# Altium PCB Card_reader.PcbDoc
Units mm, origin at the board's own origin, x right, y up, seen from the top; angles counter-clockwise.
Board outline 84.07 x 132.08 mm, 2 copper layers (Top Layer, Bottom Layer); 39 components, 41 nets, 148 pads, 35 vias.
Unrouted connection lines stored in the file: 29.
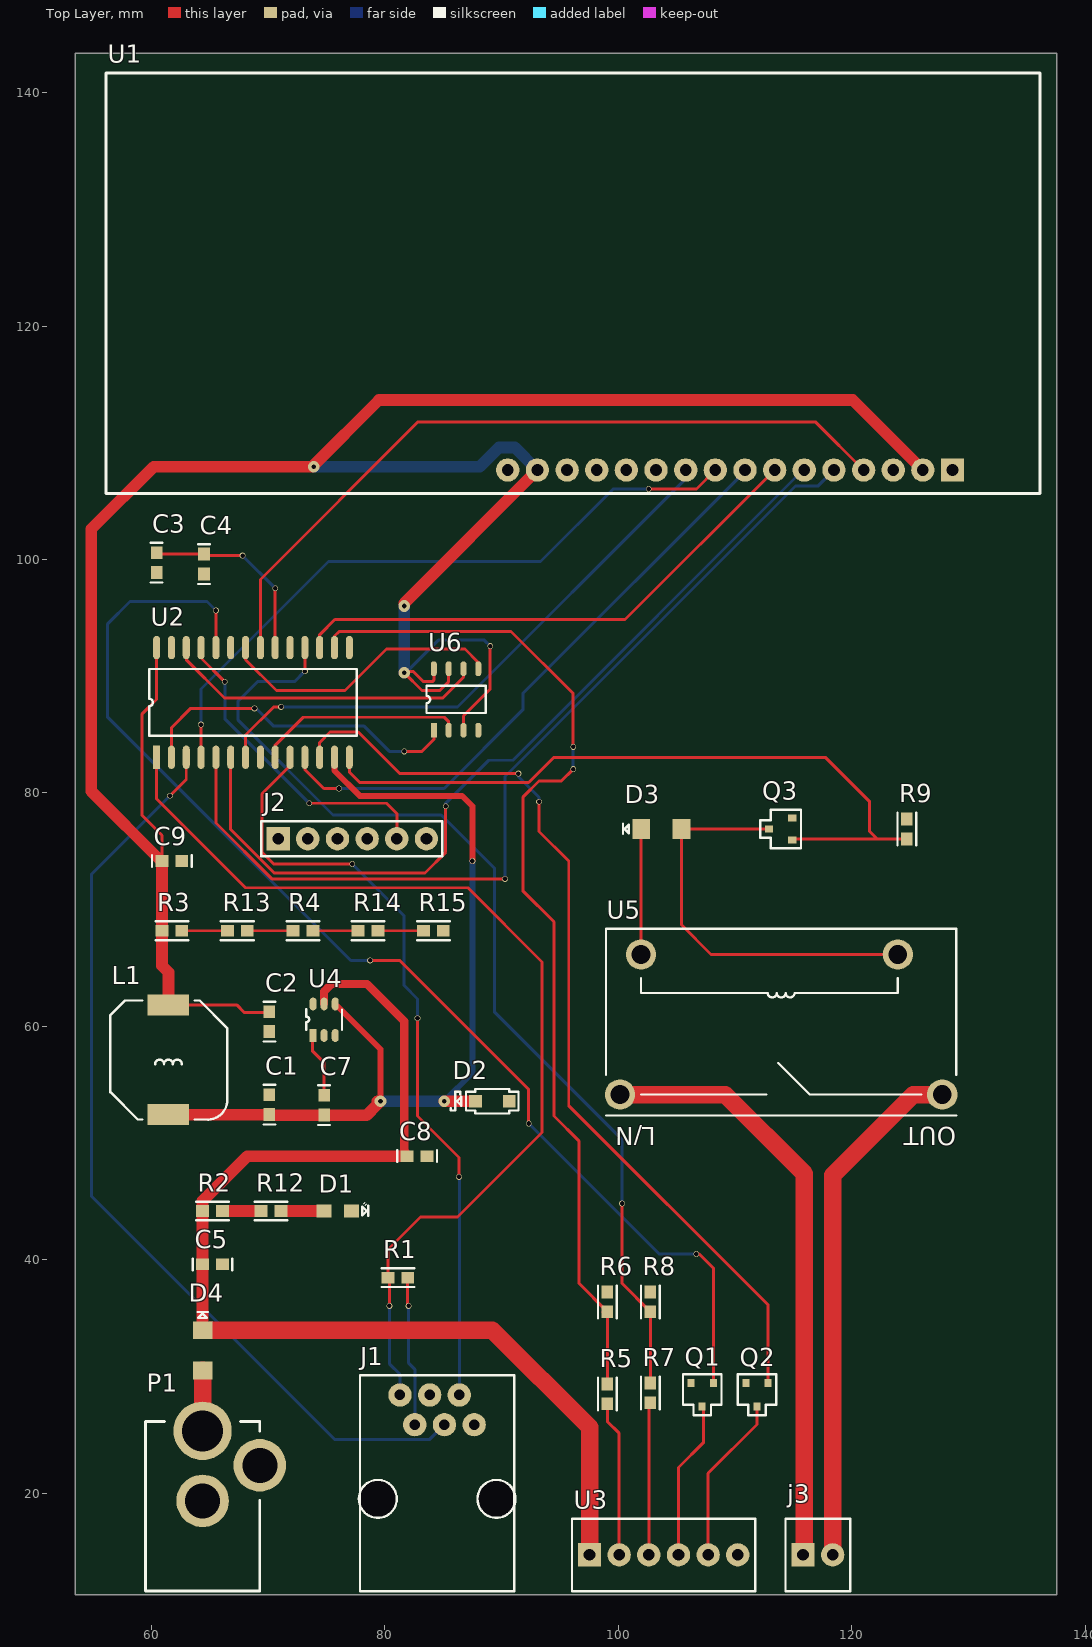
[diagram p0: Top Layer view]
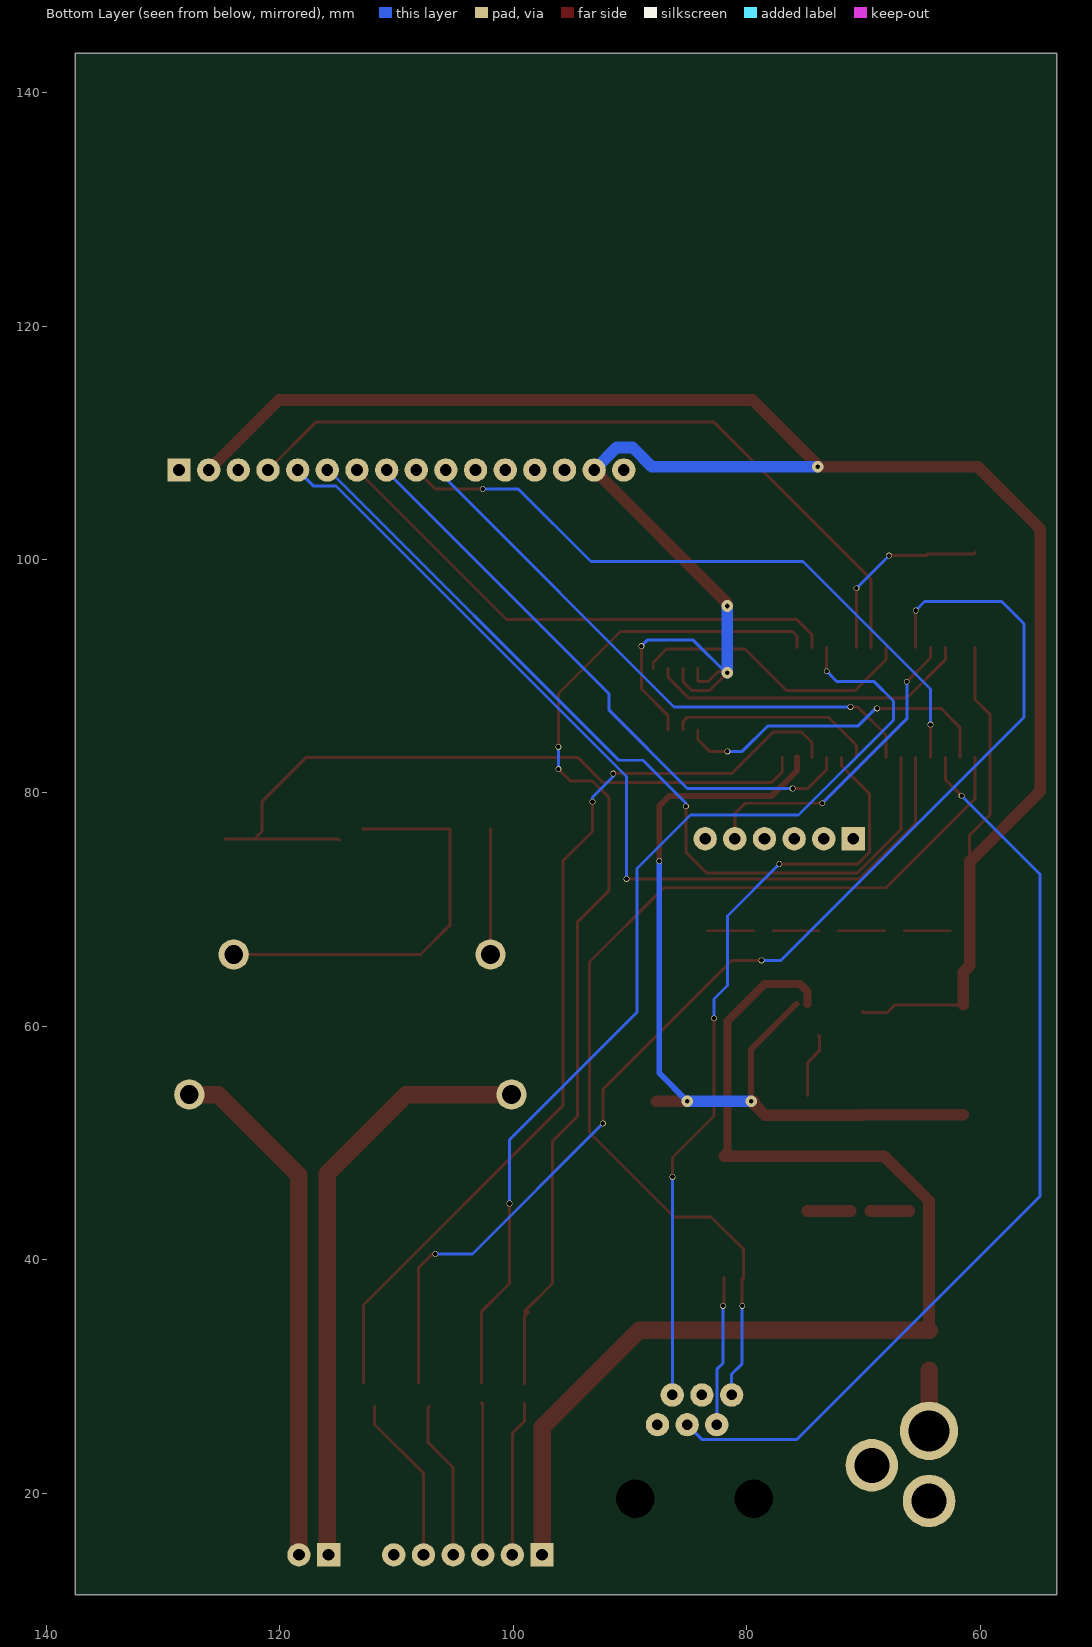
[diagram p1: Bottom Layer view, seen from below]
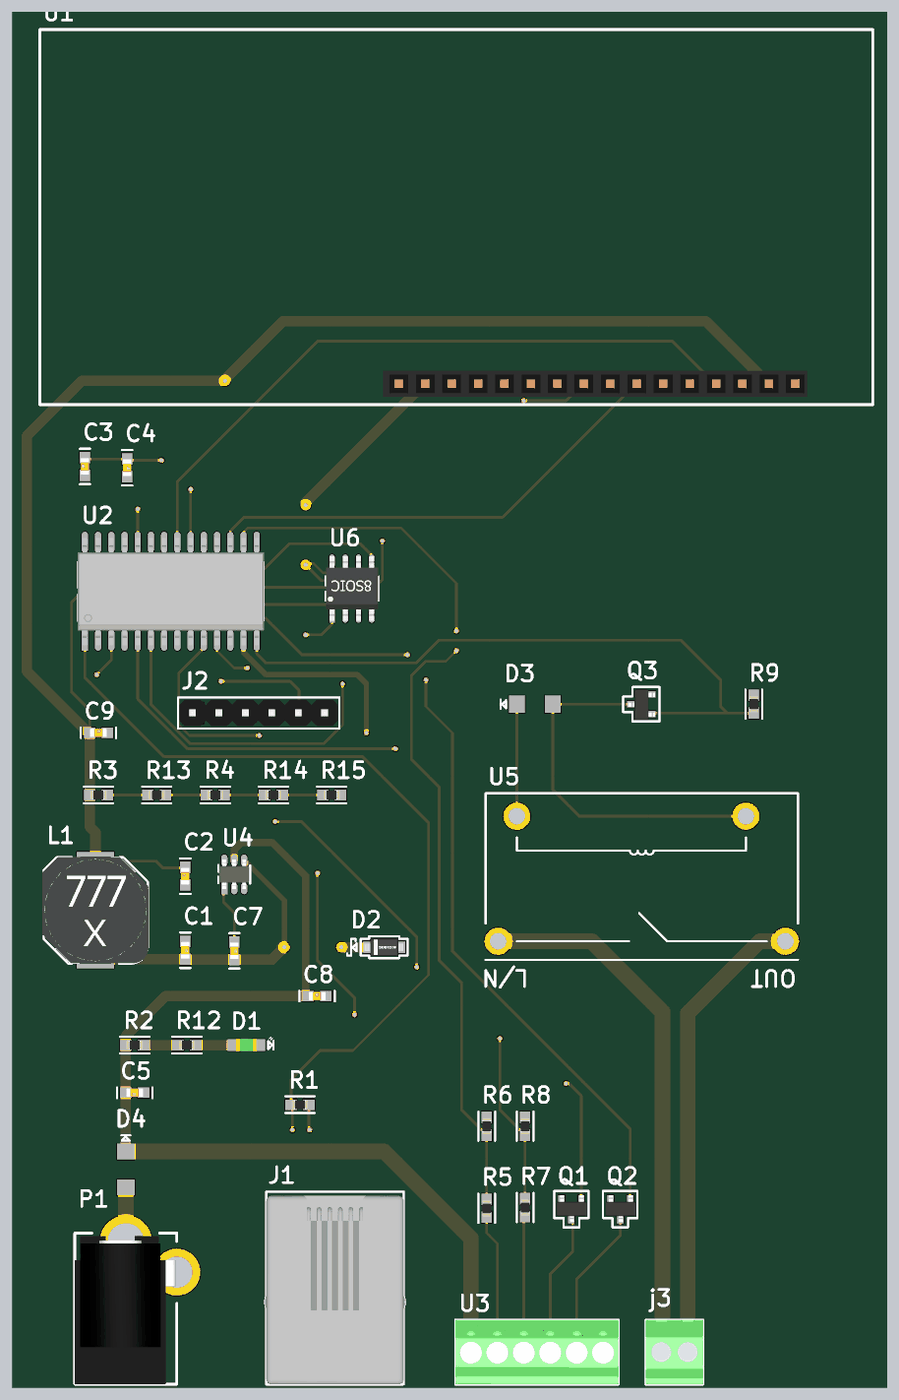
[diagram p2: 3D render of the assembled board from above, using the file's embedded part models]

## Layer stack, top to bottom
Top Solder: solder mask 0.0102, Solder Resist, Dk 3.5
Top Layer: signal copper 0.0356
Dielectric 1: dielectric 0.32, FR-4, Dk 4.8
Bottom Layer: signal copper 0.0356
Bottom Solder: solder mask 0.0102, Solder Resist, Dk 3.5

## Board outline
53.467,11.303 137.541,11.303 137.541,143.383 53.467,143.383

## Design rules (kind name [scope] priority, off if disabled: settings)
Clearance [All] p1: gap=0.254
Height [All] p1: minheight=0 maxheight=40 prefheight=12.7
PolygonConnect [All] p1: connectstyle=Relief reliefconductorwidth=0.254 reliefentries=4 polygonreliefangle="90 Angle" airgapwidth=0.254
RoutingVias [All] p1: holewidth=0.711 width=1.27 viastyle="Through Hole" minholewidth=0.711 minwidth=1.27 maxholewidth=0.711 maxwidth=1.27
SolderMaskExpansion [All] p1: expansion=0.102
UnpouredPolygon [All] p1: allowunpoured=FALSE
Width [All] p1: maxlimit=2 minlimit=0.254 preferedwidth=0.254
28 further rules are at their usual default settings.

## Classes and differential pairs
component class Designator: C5 C7 C8 C9 D1 D2 D4 L1 P1 R2 R3 R4 R12 R13 R14 R15 U4
component class Flash: U6
component class LCD: U1
component class PIC: C1 C2 C3 C4 J1 J2 R1 U2
component class Reader: Q1 Q2 R5 R6 R7 R8 U3
component class Relay: D3 j3 Q3 R9 U5

## Components (designator, comment, footprint, x,y, rotation, side; value= is the part's Value field where it differs from the comment)
C1 "100nF" "CAP 0603" 70.104,53.301 r270 top
C2 "100nF" "CAP 0603" 70.104,60.413 r90 top
C3 "10uF" "CAP 0603" 60.452,99.734 r90 top
C4 "1uF" "CAP 0603" 64.516,99.607 r270 top
C5 "10uF" "CAP 0603" 65.239,39.624 r180 top
C7 "100nF" "CAP 0603" 74.803,53.252 r270 top
C8 "4.7uF" "CAP 0603" 82.765,48.895 r0 top
C9 "22uF" "CAP 0603" 61.761,74.168 r0 top
D1 "Green LED" "LED 2012" 75.97,44.196 r0 top
D2 "Diode BAT17" "SOD-123F 12 MM" 84.957,55.894 r0 top
D3 "GF1A" SMA/DO-214AC_21 103.685,76.917 r180 top
D4 "GF1A" SMA/DO-214AC_21 64.389,32.258 r90 top
J1 "Program / Debug" RJ12_90 91.081,30.132 r270 top
J2 "Serial" "HEADER 6 PIN" 77.216,76.073 r0 top
j3 "Bornier 2 pin" "BORNIER 2 PIN" 115.824,14.732 r0 top
L1 "33uH" IND 61.468,57.15 r0 top
P1 "MJ-179PH" "DC JACK" 64.389,11.659 r90 top
Q1 "2N7002" TO-236AB 107.188,28.448 r0 top
Q2 "2N7002" TO-236AB 111.887,28.448 r0 top
Q3 "2N7002" TO-236AB 113.908,76.917 r270 top
R1 "4.7k" "RES 0603" 81.114,38.481 r0 top
R2 "470R" "RES 0603" 65.239,44.196 r180 top
R3 "27K" "RES 0603" 61.761,68.199 r180 top
R4 "8.2K" "RES 0603" 72.986,68.199 r180 top
R5 "58K" "RES 0603" 99.06,28.536 r270 top
R6 "22K" "RES 0603" 99.06,36.41 r270 top
R7 "58K" "RES 0603" 102.743,28.614 r270 top
R8 "22K" "RES 0603" 102.743,36.41 r270 top
R9 "20K" "RES 0603" 124.714,76.917 r90 top
R12 "20R" "RES 0603" 70.255,44.196 r180 top
R13 "1K" "RES 0603" 67.361,68.199 r180 top
R14 "150R" "RES 0603" 78.562,68.199 r180 top
R15 "100R" "RES 0603" 84.162,68.199 r180 top
U1 "FDCC1602L-NSWBBW-91LE" LCD 56.134,105.664 r180 top
U2 "PIC32MX220F032B" "SOIC (28)" 68.707,87.757 r90 top
U3 "LXM-R11_1" "BORNIER 6 PIN" 110.237,14.732 r0 top
U4 "LMR16006" "SOT (6)" 74.803,60.579 r90 top
U5 "Relay" RELAY 98.952,68.367 r180 top
U6 "SST26VF032B-104I/SM" "SOIC 8" 86.106,88.011 r90 top

## Footprints (in the part's own frame and the unit in brackets; to place one, negate y for a bottom-side part, rotate by r counter-clockwise, add the part's x,y. Pads: shape width x height; smd on the part's side, far side on the other; paste and mask are expansions set on the pad)
"BORNIER 2 PIN" [mm]
  rect 2x2 hole 1: 1(0,0)
  round 2 hole 1: 2(2.54,0)
  silkscreen extent -1.5,-3.1 4.04,3.1, body extent -1.5,-3.1 4.04,3.1, height 8.5
"BORNIER 6 PIN" [mm]
  rect 2x2 hole 1: 1(-12.7,0)
  round 2 hole 1: 2(-10.16,0) 3(-7.62,0) 4(-5.08,0) 5(-2.54,0) 6(0,0)
  silkscreen extent -14.2,-3.1 1.5,3.1, body extent -14.2,-3.1 1.5,3.1, height 8.5
"CAP 0603" [mm]
  rect 1.1x1 smd: 1(-0.85,0) 2(0.85,0)
  silkscreen extent -1.7,-0.5 1.7,0.5, body extent -0.8,-0.4 0.8,0.4, height 0.3
"DC JACK" [mm]
  round 5 hole 3.5: 1(13.7,0)
  round 4.5 hole 3: 2(10.75,-4.9) 3(7.7,0)
  silkscreen extent 0,-4.9 14.5,4.9, body extent 0,-4.8 14.2,4.9, height 10.75
"HEADER 6 PIN" [mm]
  rect 2x2 hole 1: 1(-6.35,0)
  round 2 hole 1: 2(-3.81,0) 3(-1.27,0) 4(1.27,0) 5(3.81,0) 6(6.35,0)
  silkscreen extent -7.8,-1.5 7.7,1.5, body extent -7.7,-1.25 7.54,1.29, height 8.85
IND [mm]
  rect 3.56x1.78 smd: 1(0,-4.7) 2(0,4.7)
  silkscreen extent -4.98,-5.13 5.02,5.07, body extent -5.1,-5.15 5.1,5.15, height 5
LCD [mm]
  rect 2x2 hole 1: 1(-72.5,-2)
  round 2 hole 1: 2(-69.96,-2) 3(-67.42,-2) 4(-64.88,-2) 5(-62.34,-2) 6(-59.8,-2) 7(-57.26,-2) 8(-54.72,-2) 9(-52.18,-2) 10(-49.64,-2) 11(-47.1,-2) 12(-44.56,-2) 13(-42.02,-2) 14(-39.48,-2) 15(-36.94,-2) 16(-34.4,-2)
  silkscreen extent -80,-36 0,0, body extent -73.75,-3.24 -32.96,-0.76, height 8.79
"LED 2012" [mm]
  rect 1.25x1.1 smd: 1(-1.175,0) 2(1.175,0)
  silkscreen extent 2.1,-0.43 2.61,0.76, body extent -1,-0.62 1,0.63, height 1.1
RELAY [mm]
  round 2.6 hole 1.6: 11(-1.2,14.2) 14(-28.8,14.2) A1(-3,2.2) A2(-25,2.2)
  silkscreen extent -30,0 0,16, body extent -30,0 0,16, height 26.5
"RES 0603" [mm]
  rect 1.1x1 smd: 1(-0.85,0) 2(0.85,0)
  silkscreen extent -1.4,-0.8 1.4,0.8, body extent -0.77,-0.43 0.78,0.43, height 0.43
RJ12_90 [mm]
  round 2 hole 0.9: 1(1.7,-9.78) 2(4.24,-8.51) 3(1.7,-7.24) 4(4.24,-5.97) 5(1.7,-4.7) 6(4.24,-3.43)
  round 1.524 hole 3.3: ""(10.6,-1.52) ""(10.6,-11.68)
  silkscreen extent 0,-13.31 18.5,0.11, body extent 0.4,-13.2 18.5,0, height 11.75
SMA/DO-214AC_21 [mm]
  rect 1.52x1.68 smd: 1(-1.725,0) 2(1.725,0)
  silkscreen extent 2.77,-0.43 3.28,0.43, body extent -2.37,-1.45 2.38,1.45, height 2.74
"SOD-123F 12 MM" [mm]
  rect 1.1x1.1 smd: 1(5.7,-2.3) 3(2.8,-2.3)
  silkscreen extent 0.7,-3.35 6.5,-1.25, body extent 2.35,-3.15 6.1,-1.45, height 1.2
"SOIC 8" [mm]
  rect 1.27x0.51 smd: 1(-2.635,1.905)
  oval 1.27x0.51 smd: 2(-2.635,0.635) 3(-2.635,-0.635) 4(-2.635,-1.905) 5(2.635,-1.905) 6(2.635,-0.635) 7(2.635,0.635) 8(2.635,1.905)
  silkscreen extent -1.16,-2.54 1.17,2.54, body extent -3.1,-2.5 3.1,2.5, height 1.9
"SOIC (28)" [mm]
  rect 2x0.6 smd: 1(-4.7,8.255)
  oval 2x0.6 smd: 2(-4.7,6.985) 3(-4.7,5.715) 4(-4.7,4.445) 5(-4.7,3.175) 6(-4.7,1.905) 7(-4.7,0.635) 8(-4.7,-0.635) 9(-4.7,-1.905) 10(-4.7,-3.175) 11(-4.7,-4.445) 12(-4.7,-5.715) 13(-4.7,-6.985) 14(-4.7,-8.255) 15(4.7,-8.255) 16(4.7,-6.985) 17(4.7,-5.715) 18(4.7,-4.445) 19(4.7,-3.175) 20(4.7,-1.905) 21(4.7,-0.635) 22(4.7,0.635) 23(4.7,1.905) 24(4.7,3.175) 25(4.7,4.445) 26(4.7,5.715) 27(4.7,6.985) 28(4.7,8.255)
  silkscreen extent -2.86,-8.89 2.87,8.89, body extent -5.17,-8.95 5.13,8.95, height 2.65
"SOT (6)" [mm]
  rect 1.1x0.6 smd: 1(-1.35,0.95)
  oval 1.1x0.6 smd: 2(-1.35,0) 3(-1.35,-0.95) 4(1.35,-0.95) 5(1.35,0) 6(1.35,0.95)
  silkscreen extent -0.87,-1.53 0.9,1.52, body extent -1.42,-1.46 1.42,1.46, height 1.25
TO-236AB [mm]
  rect 0.6x0.7 smd: 1(0.95,1) 2(-0.95,1) 3(0,-1)
  silkscreen extent -1.65,-1.75 1.65,1.75, body extent -1.45,-1.28 1.55,1.32, height 1.1

## Part data
C1 C2 C3 C4 C5 C7 C8 C9: library part Cap, "Capacitor"
D1: library part LED2, "Typical INFRARED GaAs LED"
D2: "Silicon RF Schottky Diode for Mixer Applications in the VHF/UHF Range"
D3 D4: library part Diode, "Default Diode"
J1: library part Debug, "RJ11"
J2: "Header 6 pin"
j3: library part "Header 2 pin"
L1: library part Inductor, "Inductor"
P1: "Connecteurs DC Jacks"
Q1 Q2 Q3: "Transistor MOSFET, Canal N, 300 mA, 60 V, 2.8 ohm, 10 V, 2 V"
R1 R2 R3 R4 R5 R6 R7 R8 R9 R12 R13 R14 R15: library part Res1, "Resistor"
U3: "Lecteur RFid"
U4: "Régulateurs à découpage DC/DC ajustables"
U5: "Relais de puissance"

## Via types
v1: diameter 0.5, hole 0.4, Top Layer to Bottom Layer, 30 vias
v2: diameter 1, hole 0.4, Top Layer to Bottom Layer, 5 vias

## Nets (pads, with @x,y where several pads share a name; then routed paths per layer and width w, separated by ;. In a path a pad name is that pad's centre, name@x,y a point inside that pad or via, vN(x,y) a via of type N, cw(c..) or ccw(c..) an arc to the next point about the centre after c; other vN are vias at no path point)
ALIM: D4.1 P1.1 | length 5.2
  Top Layer w1.5: P1.1 D4.1
CE: U2.2 U6.1 | length 28.4
  Top Layer w0.254: U2.2 61.722,85.598 63.373,87.249 v1(68.834,87.249) ; v1(81.661,83.566) 83.185,83.566 84.201,84.582 U6.1
  Bottom Layer w0.254: v1(68.834,87.249) 68.961,87.249 70.485,85.725 78.232,85.725 80.391,83.566 v1(81.661,83.566)
DATA0: R5.2 U3.2 | length 13.4
  Top Layer w0.254: R5.2 99.06,26.162 100.077,25.145 U3.2
DATA1: R7.2 U3.3 | length 13.1
  Top Layer w0.254: U3.3 102.617,27.638 R7.2
DB0: U1.7 U2.17 | length 45.9
  Top Layer w0.254: U2.17 74.422,93.555 75.721,94.854 100.584,94.854 U1.7
DB1: U1.8 U2.11 | length 51.6
  Top Layer w0.254: U2.11 73.152,82.019 74.78,80.391 v1(76.073,80.391)
  Bottom Layer w0.254: v1(76.073,80.391) 85.09,80.391 91.821,87.122 91.821,88.512 U1.8@110.914,107.604
DB2: U1.9 U2.4 | length 58.2
  Top Layer w0.254: U2.4 v1(64.262,85.852) ; v1(102.616,106.045) 106.695,106.045 U1.9 U1.9@108.314,107.171
  Bottom Layer w0.254: v1(64.262,85.852) 64.262,88.9 75.184,99.822 93.345,99.822 99.568,106.045 v1(102.616,106.045)
DB3: U1.10 U2.7 | length 49.4
  Top Layer w0.254: U2.7 68.072,84.963 70.485,87.376 v1(71.12,87.376)
  Bottom Layer w0.254: v1(71.12,87.376) 86.233,87.376 105.774,106.917 U1.10
"DISABLE GREEN": Q2.1 U2.12 | length 81.2
  Top Layer w0.254: U2.12 74.422,84.328 75.311,85.217 77.724,85.217 81.28,81.661 v1(91.44,81.661) ; v1(93.218,79.248) 93.218,76.708 95.758,74.168 95.758,53.213 112.837,36.134 Q2.1
  Bottom Layer w0.254: v1(91.44,81.661) 91.44,81.407 93.218,79.629 v1(93.218,79.248)
"DISABLE RED": Q1.1 U2.24 | length 104.5
  Top Layer w0.254: U2.24 v1(65.532,95.631) ; v1(78.74,65.659) 81.28,65.659 92.329,54.61 v1(92.329,51.689) ; v1(106.68,40.513) 106.934,40.513 108.138,39.309 Q1.1
  Bottom Layer w0.254: v1(65.532,95.631) 64.77,96.393 58.166,96.393 56.261,94.488 56.261,86.487 77.089,65.659 v1(78.74,65.659) ; v1(92.329,51.689) 103.505,40.513 v1(106.68,40.513)
E: U1.6 U2.6 | length 73.6
  Top Layer w0.254: U2.6 66.802,76.88 70.53,73.152 83.439,73.152 85.217,74.93 v1(85.217,78.867)
  Bottom Layer w0.254: v1(85.217,78.867) 85.217,79.121 88.9,82.804 90.972,82.804 115.832,107.664 U1.6
GND: C1.1 C2.1 C3.1 C4.2 C5.1 C8.2 C9.2 D1.2 D2.1 J1.3 J2.1 P1.2 Q1.2 Q2.2 Q3.2 R6.1 R8.1 R9.2 R15.1 U1.1 U1.16 U2.8 U2.19 U2.27 U3.6 U4.2 U6.4
"GREEN LED": Q2.3 U3.5 | length 14.5
  Top Layer w0.254: U3.5 107.697,21.718 111.887,25.908 Q2.3
L/N: j3.1 U5.11 | length 51.3
  Top Layer w1.5: U5.11 109.155,54.167 115.951,47.371 115.951,14.859 j3.1
MCLR: J1.1 R1.1 U2.1 | length 87.2
  Top Layer w0.254: U2.1 60.452,79.502 68.072,71.882 87.122,71.882 93.472,65.532 93.472,50.927 86.233,43.688 83.058,43.688 80.264,40.894 R1.1 80.391,38.354 v1(80.391,36.068)
  Bottom Layer w0.254: v1(80.391,36.068) 80.391,31.115 81.301,30.205 J1.1
MISO: U2.9 U6.2 | length 17.8
  Top Layer w0.254: U2.9 70.612,84.095 73.004,86.487 85.09,86.487 85.471,86.106 U6.2
MOSI: U2.22 U6.5 | length 24.6
  Top Layer w0.254: U2.22 68.072,91.419 70.718,88.773 76.588,88.773 80.144,92.329 86.868,92.329 88.011,91.186 U6.5
NetC3_2: C3.2 C4.1 U2.20 | length 16.5
  Top Layer w0.254: C3.2 60.579,100.457 C4.1 64.643,100.33 v1(67.818,100.33) ; U2.20 v1(70.612,97.536)
  Bottom Layer w0.254: v1(67.818,100.33) v1(70.612,97.536)
NetC7_1: C7.1 U4.1 | length 5.6
  Top Layer w0.254: U4.1 73.787,59.163 73.787,57.912 74.803,56.896 C7.1
NetD1_1: D1.1 R12.1 | length 3.7
  Top Layer w1: R12.1 D1.1
NetR2_1: R2.1 R12.2 | length 3.3
  Top Layer w1: R2.1 R12.2
NetR3_1: R3.1 R13.2 | length 3.9
  Top Layer w0.254: R3.1 R13.2
NetR4_1: R4.1 R14.2 | length 3.9
  Top Layer w0.254: R4.1 R14.2
NetR4_2: R4.2 R13.1 U4.3 | length 3.9
  Top Layer w0.254: R13.1 R4.2
NetR5_1: R5.1 R6.2 U2.16 | length 89
  Top Layer w0.254: U2.16 75.692,93.439 76.091,93.838 90.82,93.838 96.139,88.519 v1(96.139,83.947) ; v1(96.139,82.042) 95.123,81.026 93.218,81.026 91.823,79.631 91.823,71.626 94.488,68.961 94.488,52.324 96.647,50.165 96.647,37.973 R6.2 ; R6.2@98.679,35.56 99.06,35.179 R5.1
  Bottom Layer w0.254: v1(96.139,82.042) v1(96.139,83.947)
NetR7_1: R7.1 R8.2 U2.18 | length 87.3
  Top Layer w0.254: v1(73.152,90.424) U2.18 ; v1(100.33,44.831) 100.33,37.973 R8.2 R7.1
  Bottom Layer w0.254: v1(73.152,90.424) 72.263,89.535 69.088,89.535 67.437,87.884 67.437,86.233 75.561,78.109 84.832,78.109 89.408,73.533 89.408,61.214 100.33,50.292 v1(100.33,44.831)
NetR14_1: R14.1 R15.2 | length 3.9
  Top Layer w0.254: R14.1 R15.2
OUT: j3.2 U5.14 | length 44.8
  Top Layer w1.5: j3.2 118.364,47.244 125.287,54.167 U5.14
PGC: J1.5 U2.10 | length 66.6
  Top Layer w0.254: U2.10 71.882,82.327 69.485,79.93 69.485,74.915 70.486,73.914 v1(77.216,73.914) ; v1(82.804,60.706) 82.804,52.324 86.36,48.768 v1(86.36,47.117)
  Bottom Layer w0.254: v1(77.216,73.914) 81.661,69.469 81.661,63.5 82.804,62.357 v1(82.804,60.706) ; v1(86.36,47.117) 86.381,47.096 J1.5
PGD: J1.4 U2.3 | length 80.1
  Top Layer w0.254: v1(61.595,79.756) 62.992,81.153 U2.3
  Bottom Layer w0.254: 61.404,79.566 54.864,73.025 54.864,45.466 75.692,24.638 83.857,24.638 J1.4
R/W: U1.5 U2.5 | length 80.2
  Top Layer w0.254: U2.5 65.532,77.431 70.319,72.644 v1(90.297,72.644) ; U1.5 U1.5@118.491,107.647
  Bottom Layer w0.254: v1(90.297,72.644) 90.297,81.41 115.186,106.299 115.346,106.299 115.362,106.283 117.093,106.283 U1.5
"RED LED": Q1.3 U3.4 | length 13.7
  Top Layer w0.254: U3.4 105.157,22.226 107.315,24.384 107.315,27.321 Q1.3
RELAY: Q3.1 R9.1 U2.14 | length 62
  Top Layer w0.254: U2.14 76.962,81.788 77.851,80.899 92.329,80.899 94.488,83.058 117.729,83.058 121.539,79.248 121.539,76.708 122.18,76.067 ; Q3.1 115.008,76.067 122.18,76.067 ; R9.1 122.18,76.067
RIN: D3.2 U5.A1 | length 10.8
  Top Layer w0.254: U5.A1 101.96,66.175 D3.2
ROUT: D3.1 Q3.3 U5.A2 | length 35.3
  Top Layer w0.254: Q3.3 D3.1 105.41,68.707 107.95,66.167 U5.A2
RS: U1.4 U2.21 | length 64.8
  Top Layer w0.254: U2.21 69.342,98.298 82.804,111.76 116.918,111.76 U1.4
SCK: U2.26 U6.6 | length 27.6
  Top Layer w0.254: U2.26 62.992,91.419 66.273,88.138 84.963,88.138 86.741,89.916 U6.6
TX: J2.5 U2.25 | length 27.2
  Top Layer w0.254: U2.25 64.262,91.567 v1(66.294,89.535) ; v1(73.533,79.121) 80.137,79.121 81.026,78.232 J2.5
  Bottom Layer w0.254: v1(66.294,89.535) 66.294,86.36 v1(73.533,79.121)
V3P3: C1.2 C7.2 D2.3 J1.2 L1.1 R1.2 U2.13 U2.23 U4.4 | length 90.3
  Top Layer w0.254: C1.2 C1.2 ; C1.2@70.153,52.402 C1.2 ; C1.2@70.153,52.45 C1.2 ; R1.2 81.964,36.195 82.091,36.068 v1(82.042,36.068) ; D2.3 D2.3@87.884,53.721
  Top Layer w0.5: U2.13 75.692,81.915 77.855,79.752 86.614,79.752 87.503,78.863 v1(87.503,74.168) ; U4.4 79.629,58.053 v2(79.629,53.594)
  Top Layer w1: L1.1 C1.2 ; C1.2@70.153,52.402 C7.2 78.437,52.402 79.375,53.34 v2@79.375,53.594 ; v2(85.09,53.594) D2.3
  Bottom Layer w0.254: v1(82.042,36.068) 82.042,31.157 82.571,30.628 J1.2
  Bottom Layer w0.5: v2(85.09,53.594) 87.503,56.007 v1(87.503,74.168)
  Bottom Layer w1: v2(79.629,53.594) v2(85.09,53.594)
V3P3A: C2.2 C9.1 L1.2 R3.2 U1.2 U1.15 U2.28 U6.3 U6.7 U6.8 | length 220
  Top Layer w0.254: U2.28 60.452,88.011 59.182,86.741 59.182,78.105 60.911,76.376 C9.1 ; C9.1@60.911,74.09 C9.1@60.96,74.041 ; L1.2 67.309,61.85 67.945,61.214 70.055,61.214 C2.2 ; v2@73.787,107.95 v2(73.914,107.95) ; v2(81.661,96.012) v2@81.661,96.251 ; U6.8 84.201,89.662 84.074,89.535 83.312,89.535 82.423,90.424 81.788,90.424 v2(81.661,90.297) 83.185,88.773 84.709,88.773 85.471,89.535 U6.7 ; U6.3@86.736,85.381 86.736,86.609 89.027,88.9 v1(89.027,92.583)
  Top Layer w1: C9.1 C9.1@60.911,74.09 ; L1.2 61.468,64.643 60.911,65.2 R3.2 C9.1@60.911,74.09 ; v2@81.661,96.251 U1.15 ; U1.2 120.093,113.665 79.502,113.665 73.787,107.95 60.198,107.95 54.864,102.616 54.864,80.137 C9.1@60.911,74.09
  Bottom Layer w0.254: v2(81.661,90.297) 81.788,90.297 84.582,93.091 88.519,93.091 v1(89.027,92.583)
  Bottom Layer w1: v2(73.914,107.95) 88.138,107.95 89.789,109.601 91.137,109.601 U1.15 ; v2(81.661,90.297) v2(81.661,96.012)
V12: C5.2 C8.1 D4.2 R2.2 U3.1 U4.5 | length 98.9
  Top Layer w0.7: U4.5 74.803,62.992 75.438,63.627 78.486,63.627 81.661,60.452 C8.1@81.661,49.149
  Top Layer w1: D4.2 C5.2 R2.2 64.389,45.054 68.23,48.895 C8.1 C8.1@81.661,49.149
  Top Layer w1.5: D4.2 89.207,33.983 97.537,25.653 U3.1
pads on no net: J1. J1.6 J2.2 J2.3 J2.4 J2.6 P1.3 U1.3 U1.11 U1.12 U1.13 U1.14 U2.15 U4.6

## Text inside footprints (layer, text, board x,y; h text height)
U5: Top Overlay "OUT" at 128.952,51.367 h1.52 r180; Top Overlay "L/N" at 103.202,51.367 h1.52 r180